# EAGLE board PlayerTop (EAGLE 9.6.1)
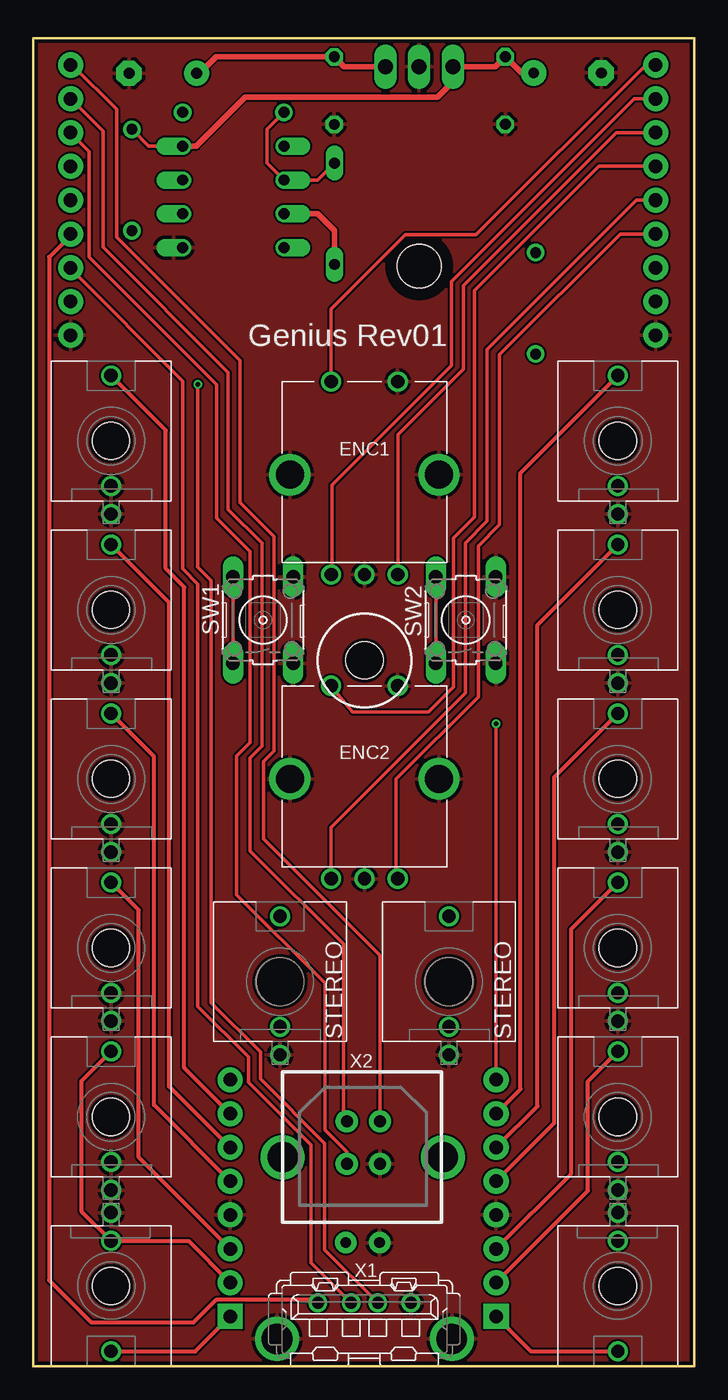
[diagram p0: board, top side]
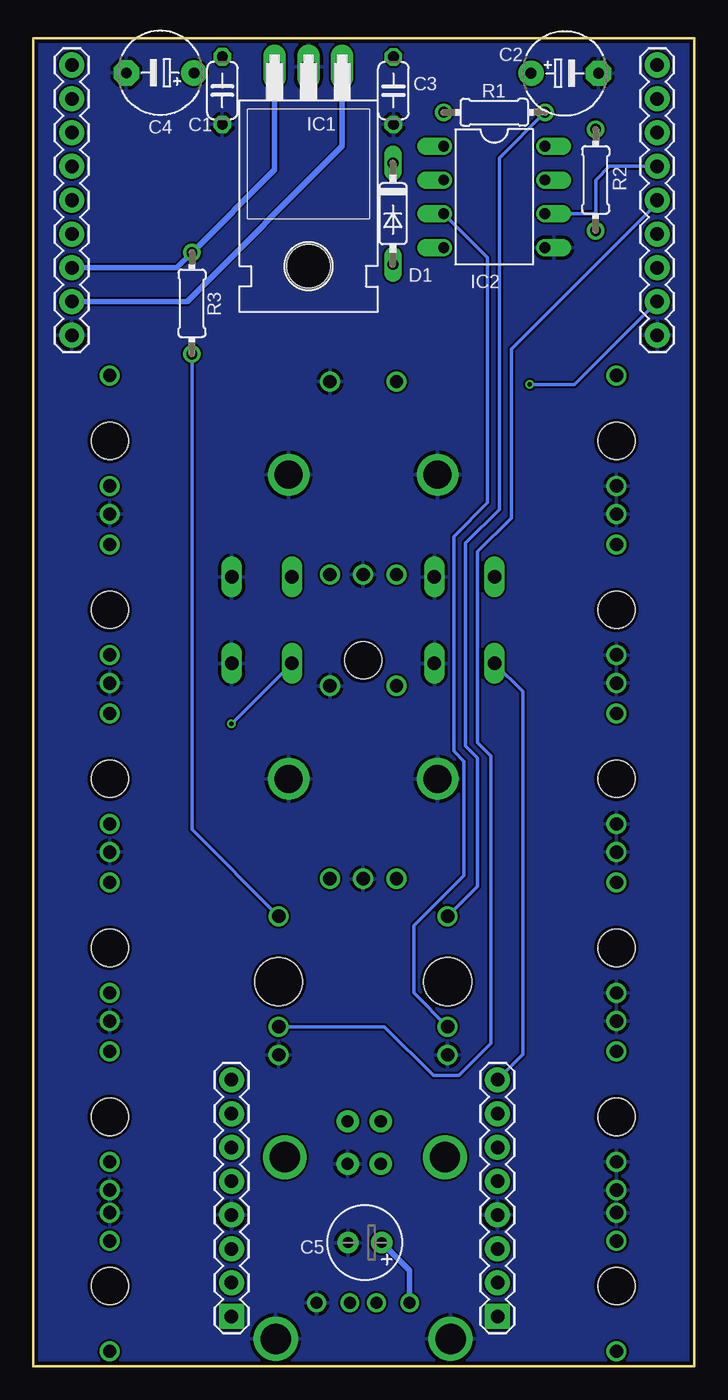
[diagram p1: board, bottom side, seen from below]

Size 49.7 x 99.82 mm. Coordinates in mm from the lower left corner, seen from the top.
Outline: 49.7,99.82 0,99.82 0,0 49.7,0 49.7,99.82
Copper layers (1*16): Top 0.035mm / dielectric 1.5mm / Bottom 0.035mm
Design rules "SeeedStudio_2layer_DRU_no_angle_20140221": minimum track width 6mil, minimum drill 12mil, track to track 6mil, track to pad 6mil, pad to pad 6mil, via to via 6mil, smd to smd 0mil, copper to edge 10mil, drill to drill 10mil, minimum pad ring 10mil, minimum via ring 6mil, stop-mask expansion 2mil, vias tented up to drill 100mil, thermal gap 10mil
Net classes: 1 power: width 0.178 mm, drill 0.305 mm, clearance 0.178 mm to class 0, clearance 0.178 mm
Holes 2.8 mm at 24.9,53.05

## Footprints (pad centres in the part's own frame; a part is rotated, then mirrored left to right if it is on the bottom)
C050-024X044 = drill 0.813 octagon: 1 -2.54,0; 2 2.54,0
E5-6 = drill 0.813 pad 1.905: + -2.54,0 | drill 0.813 pad 1.905 octagon: - 2.54,0
E2,5-6 = drill 0.813 pad 1.6: + -1.27,0; - 1.27,0
THONKICONN = drill 1: P$1 0,-5.5; P$2 0,-3.38; P$3 0,4.92 | hole 2.8: 0,0
DO35-7 = drill 0.813 long: A 3.81,0; C -3.81,0
EC12E2424407 = drill 1: C 0,-7.5; PINA -2.5,-7.5; PINB 2.5,-7.5; SWITCH1 -2.5,7; SWITCH2 2.5,7 | drill 2.1: P$1 -5.6,0; P$2 5.6,0
TO220H = drill 1.118 long: 1 -2.54,-10.16; 2 0,-10.16; 3 2.54,-10.16 | hole 3.302: 0,4.826
DIL08 = drill 0.813 offset: 1 -3.81,-3.81; 2 -1.27,-3.81; 3 1.27,-3.81; 4 3.81,-3.81; 5 3.81,3.81; 6 1.27,3.81; 7 -1.27,3.81; 8 -3.81,3.81
1X09 = drill 1.016 pad 1.88: 1 0,0; 2 2.54,0; 3 5.08,0; 4 7.62,0; 5 10.16,0; 6 12.7,0; 7 15.24,0; 8 17.78,0; 9 20.32,0
1X08 = drill 1.016 pad 1.88 square: 1 0,0 | drill 1.016 pad 1.88: 2 2.54,0; 3 5.08,0; 4 7.62,0; 5 10.16,0; 6 12.7,0; 7 15.24,0; 8 17.78,0
THONKICONN_STEREO = drill 1: P$1 0,-5.5; P$2 0,-3.38; P$3 0,4.92 | hole 3.6: 0,0
0204/7 = drill 0.813: 1 -3.81,0; 2 3.81,0
B3F-10XX = drill 1.016 long: 1 -3.251,2.261; 2 3.251,2.261; 3 -3.251,-2.261; 4 3.251,-2.261
KUSBVX = drill 0.9 pad 1.3: 1 3.5,0; 2 1,0; 3 -1,0; 4 -3.5,0 | drill 2.3 pad 2.8: M1 -6.57,2.71; M2 6.57,2.71
USB-B-PTH-VERTICAL = drill 0.914 pad 1.676: D+ 4.826,4.394; D- 4.826,7.595; GND 7.315,4.394; VBUS 7.315,7.595 | drill 2.286: P$1 0,4.902; P$2 12.04,4.902

## Placement (x,y rotation side)
C1  100n  [C050-024X044]  35.49,95.88 270 bottom
C2  47u 16v  [E5-6]  9.74,97.17 0 bottom
C3  100n 16v  [C050-024X044]  22.62,95.87 270 bottom
C4  47u 10v  [E5-6]  40.16,97.2 180 bottom
C5  10u  [E2,5-6]  24.77,9.29 180 bottom
CVINA  THONKICONN  [THONKICONN]  5.85,44.14 0 top
CVINB  THONKICONN  [THONKICONN]  5.85,31.44 0 top
CVOUTA  THONKICONN  [THONKICONN]  43.95,44.14 0 top
CVOUTB  THONKICONN  [THONKICONN]  43.95,31.44 0 top
D1  1N4148DO35-7  [DO35-7]  22.66,86.61 270 bottom
ENC1  EC12E2424407  [EC12E2424407]  24.9,67 0 top
ENC2  EC12E2424407  [EC12E2424407]  24.9,44.14 0 top
IC1  7805T  [TO220H]  29.01,87.5 180 bottom
IC2  6N137  [DIL08]  15.04,87.88 270 bottom
INL  THONKICONN  [THONKICONN]  5.85,18.74 0 top
INR  THONKICONN  [THONKICONN]  5.85,6.04 180 top
JP2  M09  [1X09]  2.8,97.79 270 bottom
JP3  M09  [1X09]  46.8,97.79 270 bottom
JP5  [1X08]  14.8,3.74 90 bottom
JP6  [1X08]  34.8,3.74 90 bottom
MIDI_IN  THONKICONN_STEREO  [THONKICONN_STEREO]  18.55,28.9 0 top
MIDI_OUT  THONKICONN_STEREO  [THONKICONN_STEREO]  31.25,28.9 0 top
OUTL  THONKICONN  [THONKICONN]  43.95,18.74 0 top
OUTR  THONKICONN  [THONKICONN]  43.95,6.04 180 top
R1  220R  [0204/7]  15.04,94.23 180 bottom
R2  10k  [0204/7]  7.42,89.15 270 bottom
R3  220R  [0204/7]  37.77,79.88 270 bottom
SW1  [B3F-10XX]  17.28,56.08 90 top
SW2  [B3F-10XX]  32.52,56.08 90 top
TRINA  THONKICONN  [THONKICONN]  5.85,69.54 0 top
TRINB  THONKICONN  [THONKICONN]  5.85,56.84 0 top
TROUTA  THONKICONN  [THONKICONN]  43.95,69.54 0 top
TROUTB  THONKICONN  [THONKICONN]  43.95,56.84 0 top
X1  KUSBVX  [KUSBVX]  24.9,4.76 180 top
X2  USBPTH-VERTICAL  [USB-B-PTH-VERTICAL]  18.75,10.81 0 top

## Library data of the parts
C1-C5 CVINA CVINB CVOUTA CVOUTB ENC1 ENC2 INL INR MIDI_IN MIDI_OUT OUTL OUTR R1-R3 TRINA TRINB TROUTA TROUTB = Rebel
D1 = diode
IC1 = adafruit
IC2 = optocoupler; MPN: 6N137; OC_FARNELL: 1328376; OC_NEWARK: 52M1895
JP2 JP3 JP5 JP6 X2 = SparkFun
SW1 SW2 = switch-omron; MPN: B3F-1000; OC_FARNELL: 176432; OC_NEWARK: 36M3542
X1 = con-kycon

## Nets
+5V: C1.1 C4.+ IC1.3 IC2.8 JP3.7 R2.1 R3.1
+12V: C2.+ C3.1 IC1.1 JP3.8
GND: C1.2 C2.- C3.2 C4.- C5.- CVINA.P$1 CVINA.P$2 CVINB.P$1 CVINB.P$2 CVOUTA.P$1 CVOUTB.P$1 ENC1.C ENC1.P$1 ENC1.P$2 ENC1.SWITCH2 ENC2.C ENC2.P$1 ENC2.P$2 ENC2.SWITCH2 IC1.2 IC2.5 INL.P$1 INL.P$2 INR.P$1 JP2.9 JP3.9 JP5.4 JP6.4 MIDI_IN.P$1 MIDI_OUT.P$1 OUTL.P$1 OUTR.P$1 SW1.3 SW1.4 SW2.3 SW2.4 TRINA.P$1 TRINA.P$2 TRINB.P$1 TRINB.P$2 TROUTA.P$1 TROUTB.P$1 X1.4 X1.M1 X1.M2 X2.GND
MIDI_IN_RING: D1.A IC2.3 MIDI_IN.P$2
MIDI_IN_TIP: MIDI_IN.P$3 R1.1
MIDI_OUT_TIP: MIDI_OUT.P$3 R3.2
N$1: D1.C IC2.2 R1.2
N$3: JP5.8 SW1.1 SW1.2
N$4: JP6.8 SW2.1 SW2.2
TOP_CVINA: CVINA.P$3 JP5.5
TOP_CVINB: CVINB.P$3 JP5.3
TOP_CVOUTA: CVOUTA.P$3 JP6.5
TOP_CVOUTB: CVOUTB.P$3 JP6.3
TOP_ENC1_A: ENC1.PINA JP3.2
TOP_ENC1_B: ENC1.PINB JP3.3
TOP_ENC1_SW: ENC1.SWITCH1 JP3.1
TOP_ENC2_A: ENC2.PINA JP3.5
TOP_ENC2_B: ENC2.PINB JP3.6
TOP_ENC2_SW: ENC2.SWITCH1 JP3.4
TOP_INL: INL.P$3 INR.P$2 JP5.2
TOP_INR: INR.P$3 JP5.1
TOP_OUTL: JP6.2 OUTL.P$3
TOP_OUTR: JP6.1 OUTR.P$3
TOP_TRINA: JP5.7 TRINA.P$3
TOP_TRINB: JP5.6 TRINB.P$3
TOP_TROUTA: JP6.7 TROUTA.P$3
TOP_TROUTB: JP6.6 TROUTB.P$3
UART5_RX: IC2.6 JP2.4 R2.2
UART5_TX: JP2.5 MIDI_OUT.P$2
USBD_DM: JP2.2 X2.D-
USBD_DP: JP2.3 X2.D+
USBD_VBUS: JP2.1 X2.VBUS
USBH_DM: JP2.7 X1.2
USBH_DP: JP2.8 X1.3
USBH_VBUS: C5.+ JP2.6 X1.1

## Tracks (layer width: path | path; a pad name or v marks a point on that pad's centre or on a via)
+5V
  Top 0.254: IC2.8 8.69,91.69 R2.1
  Top 0.406: C4.+ 36.71,97.2 C1.1 34.73,97.66 IC1.3 31.65,97.56 31.65,96.65 30.38,95.38 15.93,95.38 12.25,91.69 IC2.8
  Bottom 0.406: 31.42,97.66 IC1.3 31.55,89.92 R3.1 38.91,82.55 JP3.7
+12V
  Top 0.406: C2.+ 12.5,97.17 13.74,98.41 C3.1 23.37,97.66 IC1.1
  Bottom 0.406: IC1.1 26.47,91.69 38.15,80.01 JP3.8
GND
  pour Top: -1.74,100.78 -1.74,-0.18 50.82,-0.18 50.87,100.88
  pour Bottom: -1.74,100.78 -1.74,-0.18 52.09,-0.18 52.14,100.88
MIDI_IN_RING
  Top 0.406: IC2.3 21.39,86.61 22.66,85.34 D1.A
  Bottom 0.254: MIDI_IN.P$2 21.09,28.06 21.09,33.14 17.33,36.9 17.33,45.47 18.09,46.23 18.09,62.36 15.55,64.9 15.55,83.31 IC2.3
MIDI_IN_TIP
  Bottom 0.254: MIDI_IN.P$3 16.31,36.06 16.31,45.72 17.2,46.61 17.2,61.85 14.66,64.39 14.66,90.81 R1.1
MIDI_OUT_TIP
  Bottom 0.254: R3.2 37.77,40.34 MIDI_OUT.P$3
N$1
  Top 0.254: D1.C 21.39,89.15 IC2.2 17.58,90.42 17.58,92.96 R1.2
N$3
  Top 0.254: SW1.1 SW1.2
  Bottom 0.254: JP5.8 12.89,23.43 12.89,50.7 SW1.1
N$4  (via drill 0.35)
  Top 0.254: JP6.8 v34.8,48.28 | SW2.1 SW2.2
  Bottom 0.254: v34.8,48.28 SW2.1
TOP_CVINA
  Top 0.305: JP5.5 9.07,19.63 9.07,45.84 CVINA.P$3
TOP_CVINB
  Top 0.305: JP5.3 7.93,15.7 7.93,34.28 CVINB.P$3
TOP_CVOUTA
  Top 0.305: JP6.5 39.17,18.27 39.17,44.28 CVOUTA.P$3
TOP_CVOUTB
  Top 0.305: JP6.3 40.44,14.46 40.44,32.85 CVOUTB.P$3
TOP_ENC1_A
  Top 0.254: ENC1.PINA 22.48,59.57 22.48,66.23 31.45,75.2 31.45,81.52 45.18,95.25 JP3.2 | JP3.2
TOP_ENC1_B
  Top 0.254: ENC1.PINB 27.4,70.01 32.33,74.93 32.33,81.22 43.82,92.71 JP3.3 | JP3.3
TOP_ENC1_SW
  Top 0.254: ENC1.SWITCH1 22.4,79.46 27.98,85.04 33.29,85.04 46.04,97.79 JP3.1
TOP_ENC2_A
  Top 0.254: JP3.5 45.35,87.63 34.11,76.39 34.11,63.5 32.48,61.88 32.48,50.59 22.4,40.51 ENC2.PINA | JP3.5
TOP_ENC2_B
  Top 0.254: JP3.6 44.14,85.09 35.06,76.02 35.06,63.25 33.45,61.64 33.45,50.31 27.27,44.12 27.27,36.77 ENC2.PINB | JP3.6
TOP_ENC2_SW
  Top 0.254: JP3.4 42.5,90.17 33.15,80.82 33.15,63.83 31.57,62.25 31.57,51.03 29.69,49.15 24,49.15 ENC2.SWITCH1
TOP_INL
  Top 0.305: JP5.2 11.67,9.42 INR.P$2 3.61,11.66 3.61,21.42 INL.P$3
TOP_INR
  Top 0.305: INR.P$3 12.18,1.12 JP5.1
TOP_OUTL
  Top 0.305: JP6.2 41.71,13.19 41.71,21.42 OUTL.P$3
TOP_OUTR
  Top 0.305: JP6.1 37.42,1.12 OUTR.P$3
TOP_TRINA
  Top 0.305: JP5.7 11.36,22.43 11.36,58.55 9.96,59.94 9.96,70.35 TRINA.P$3
TOP_TRINB
  Top 0.305: JP5.6 10.21,21.03 10.21,57.39 TRINB.P$3
TOP_TROUTA
  Top 0.305: JP6.7 36.63,20.81 36.63,67.14 TROUTA.P$3
TOP_TROUTB
  Top 0.305: JP6.6 37.9,19.54 37.9,55.71 TROUTB.P$3
UART5_RX
  Bottom 0.254: R2.2 7.42,86.61 | IC2.6 7.42,86.61 | 7.42,86.61 7.42,89.15 6.4,90.17 JP2.4
UART5_TX
  Bottom 0.254: MIDI_OUT.P$2 23.29,25.52 19.61,21.84 17.71,21.84 15.29,24.26 15.29,45.85 16.31,46.86 16.31,61.21 13.77,63.75 13.77,76.45 2.8,87.42 JP2.5
USBD_DM
  Top 0.254: JP2.2 5.24,92.82 5.24,84.1 14.66,74.68 14.66,64.39 17.2,61.85 17.2,46.61 16.31,45.72 16.31,38.73 23.32,31.72 23.32,18.66 X2.D-
USBD_DP
  Top 0.254: X2.D+ 23.58,16.1 21.92,17.75 21.92,28.8 15.29,35.43 15.29,45.85 16.31,46.86 16.31,61.21 13.77,63.75 13.77,73.79 4.22,83.33 4.22,91.29 JP2.3
USBD_VBUS
  Top 0.254: JP2.1 2.93,97.79 6.26,94.47 6.26,84.86 15.55,75.57 15.55,64.9 18.09,62.36 18.09,46.23 17.33,45.47 17.33,39.62 26.06,30.89 X2.VBUS
USBH_DM
  Top 0.254: X1.2 20.88,7.78 20.88,16.64 16.18,21.34 16.18,23.24 12.37,27.05 12.37,58.8 11.23,59.94 11.23,74.04 2.8,82.47 JP2.7
USBH_DP  (via drill 0.35)
  Top 0.254: X1.3 21.9,8.76 21.9,16.76 17.07,21.59 17.07,23.62 13.39,27.3 13.39,59.05 12.37,60.07 v12.37,73.79
  Bottom 0.254: JP2.8 9.02,73.79 v12.37,73.79
USBH_VBUS
  Top 0.305: JP2.6 2.8,84.97 1.2,83.36 1.2,6.48 4.37,3.3 12.05,3.3 13.73,4.99 21.17,4.99 X1.1
  Bottom 0.406: X1.1 21.4,7.19 C5.+

## Text on the board
tPlace: Genius Rev01